# Altium PCB PEREHOD.PcbDoc
Units mm, origin at the board's own origin, x right, y up, seen from the top; angles counter-clockwise.
Board outline 90.17 x 66.14 mm, 2 copper layers (Top Layer, Bottom Layer); 3 components, 0 nets, 104 pads, 0 vias.
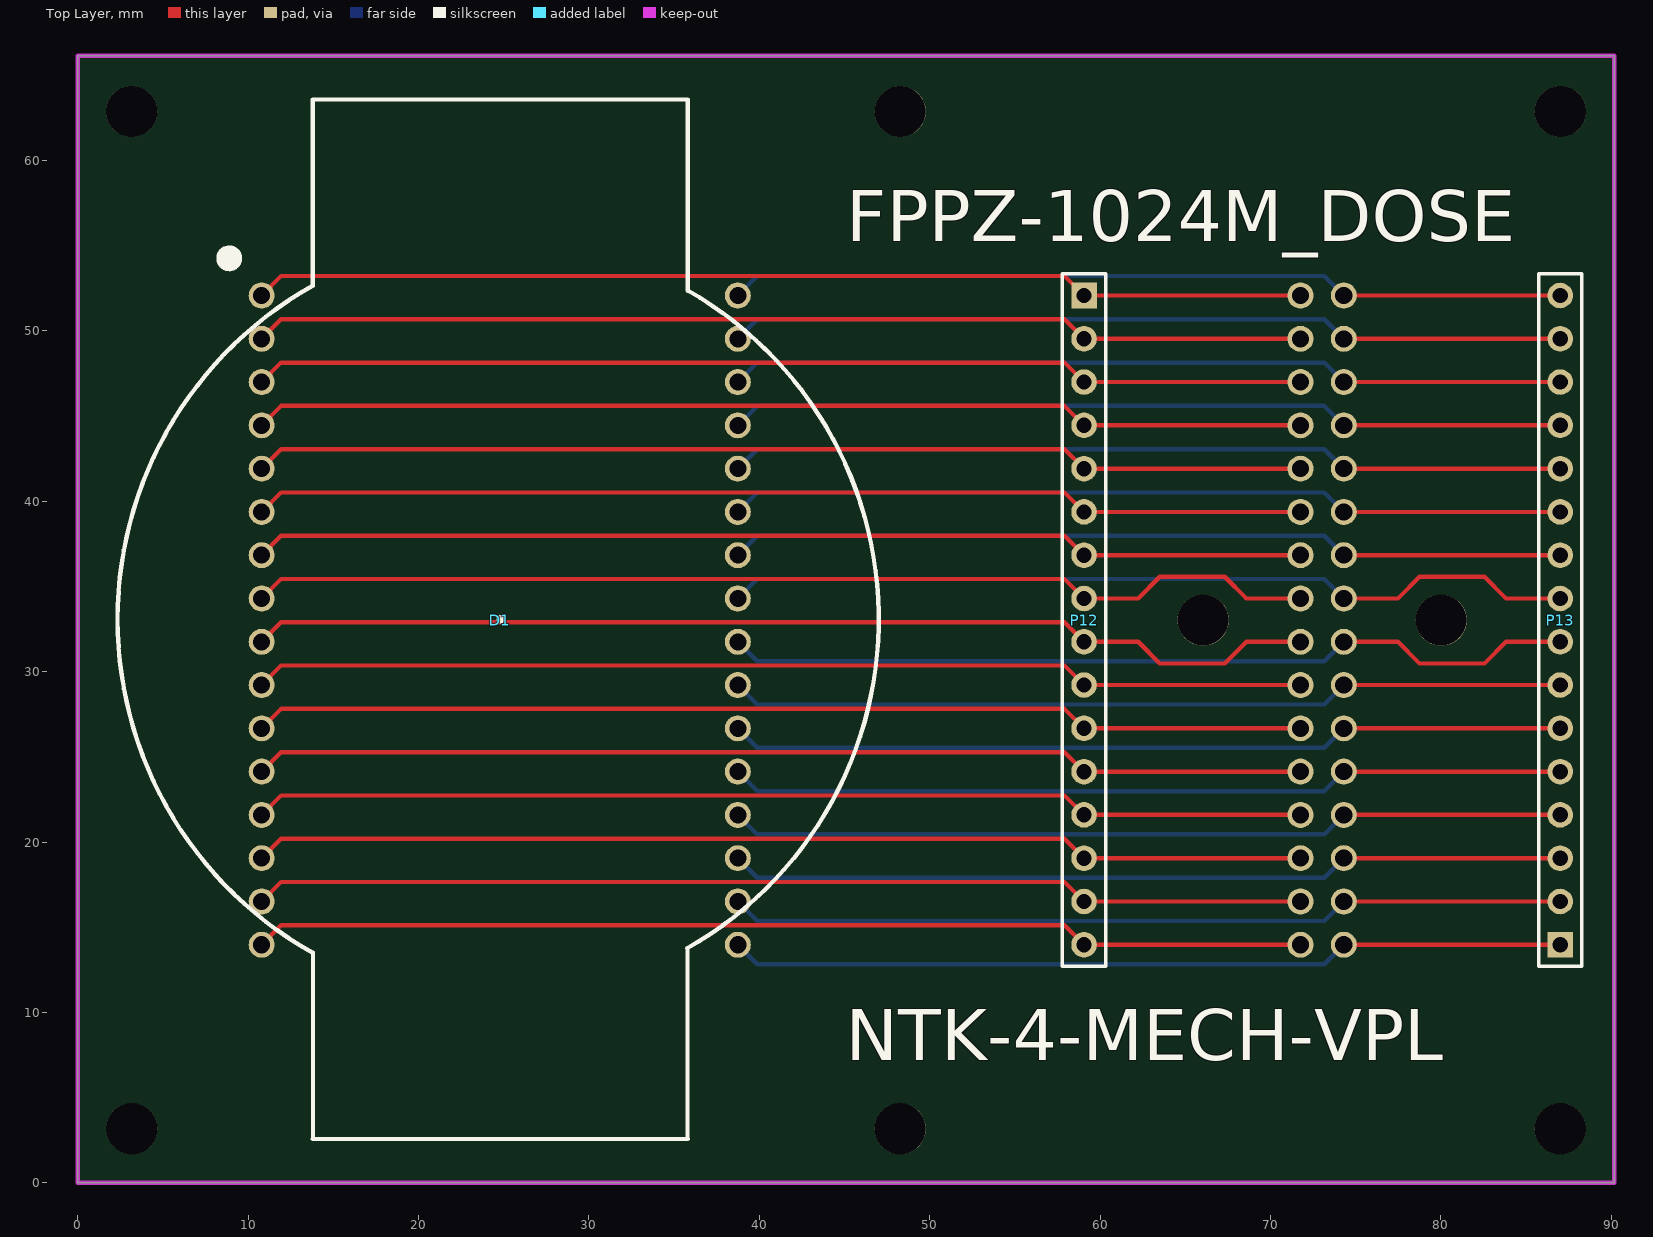
[diagram p0: Top Layer view]
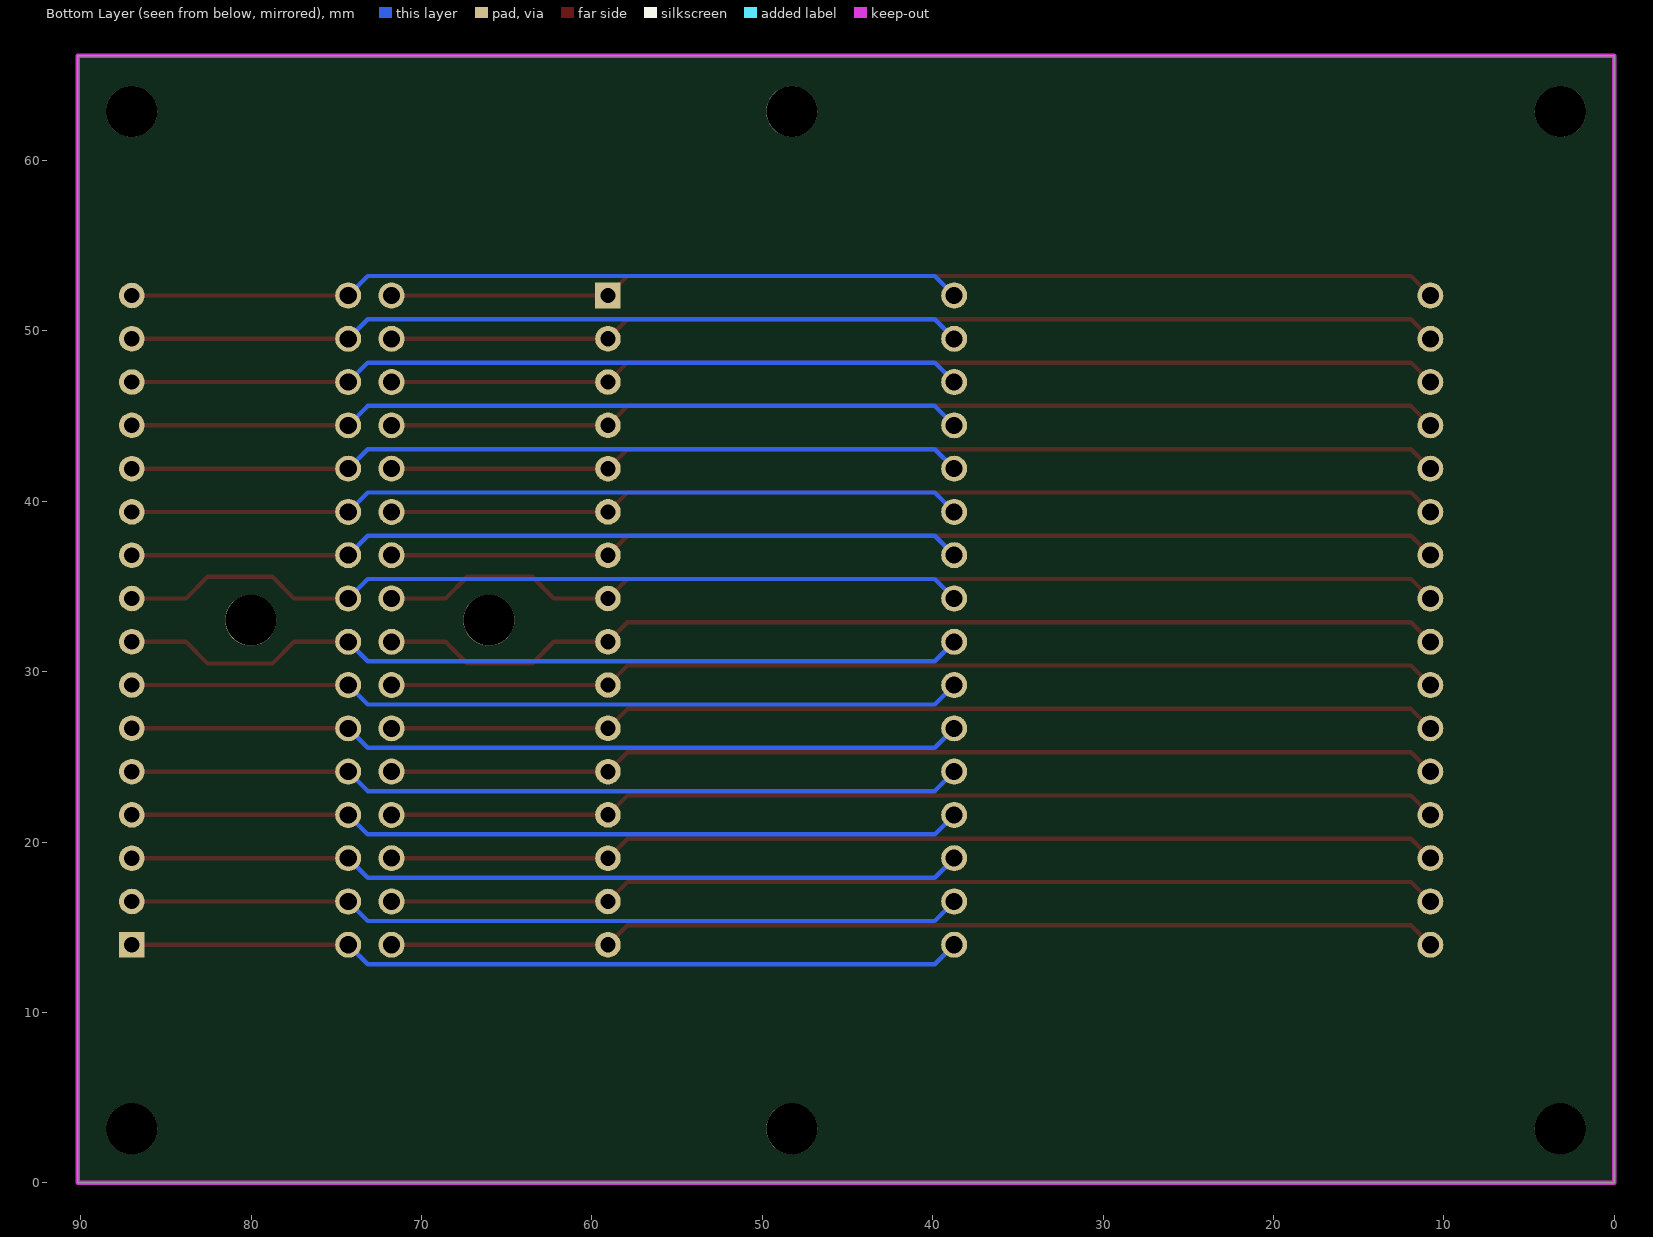
[diagram p1: Bottom Layer view, seen from below]

## Layer stack, top to bottom
Top Solder: solder mask 0.0102, Solder Resist, Dk 3.5
Top Layer: signal copper 0.0356
Dielectric 1: dielectric 0.32, FR-4, Dk 4.8
Bottom Layer: signal copper 0.0356
Bottom Solder: solder mask 0.0102, Solder Resist, Dk 3.5

## Board outline
0,0 90.17,0 90.17,66.142 0,66.142

## Design rules (kind name [scope] priority, off if disabled: settings)
Clearance [All] p1: gap=0.254
PolygonConnect [All] p1: connectstyle=Relief reliefconductorwidth=0.254 reliefentries=4 polygonreliefangle="90 Angle" airgapwidth=0.254
RoutingVias [All] p1: holewidth=0.711 width=1.27 viastyle="Through Hole" minholewidth=0.711 minwidth=1.27 maxholewidth=0.711 maxwidth=1.27
SolderMaskExpansion [All] p1: expansion=0.102
Width [All] p1: maxlimit=0.254 minlimit=0.254 preferedwidth=0.254
29 further rules are at their usual default settings.

## Components (designator, comment, footprint, x,y, rotation, side; value= is the part's Value field where it differs from the comment)
D1 "FPPZ 1024M" FPPZ_1024M 10.795,52.07 r270 top
P12 "Header 16" HDR1X16 59.055,52.07 r270 top
P13 "Header 16" HDR1X16 86.995,13.97 r90 top

## Footprints (in the part's own frame and the unit in brackets; to place one, negate y for a bottom-side part, rotate by r counter-clockwise, add the part's x,y. Pads: shape width x height; smd on the part's side, far side on the other; paste and mask are expansions set on the pad)
FPPZ_1024M [mil]
  round 60 hole 39.37: 1(0,0) 2(100,0) 3(200,0) 4(300,0) 5(400,0) 6(500,0) 7(600,0) 8(700,0) 9(800,0) 10(900,0) 11(1000,0) 12(1100,0) 13(1200,0) 14(1300,0) 15(1400,0) 16(1500,0) 17(1500,1100) 18(1400,1100) 19(1300,1100) 20(1200,1100) 21(1100,1100) 22(1000,1100) 23(900,1100) 24(800,1100) 25(700,1100) 26(600,1100) 27(500,1100) 28(400,1100) 29(300,1100) 30(200,1100) 31(100,1100) 32(0,1100)
  silkscreen extent -453,-333 1949,1425
HDR1X16 [mm] "Connector; Header; 16 Position"
  rect 1.5x1.5 hole 0.9: 1(0,0)
  round 1.5 hole 0.9: 2(2.54,0) 3(5.08,0) 4(7.62,0) 5(10.16,0) 6(12.7,0) 7(15.24,0) 8(17.78,0) 9(20.32,0) 10(22.86,0) 11(25.4,0) 12(27.94,0) 13(30.48,0) 14(33.02,0) 15(35.56,0) 16(38.1,0)
  silkscreen extent -1.27,-1.27 39.37,1.27

## Part data
P12 P13: "Header, 16-Pin"

## Free pads (board coordinates)
  round 3 hole 3 unplated: 0(3.175,3.175) 0(3.175,62.865) 0(48.26,3.175) 0(48.26,62.865) 0(66.04,33.02) 0(80.01,33.02) 0(86.995,3.175) 0(86.995,62.865)
  round 1.524 hole 1: 0(71.755,13.97) 0(71.755,16.51) 0(71.755,19.05) 0(71.755,21.59) 0(71.755,24.13) 0(71.755,26.67) 0(71.755,29.21) 0(71.755,31.75) 0(71.755,34.29) 0(71.755,36.83) 0(71.755,39.37) 0(71.755,41.91) 0(71.755,44.45) 0(71.755,46.99) 0(71.755,49.53) 0(71.755,52.07) 0(74.295,13.97) 0(74.295,16.51) 0(74.295,19.05) 0(74.295,21.59) 0(74.295,24.13) 0(74.295,26.67) 0(74.295,29.21) 0(74.295,31.75) 0(74.295,34.29) 0(74.295,36.83) 0(74.295,39.37) 0(74.295,41.91) 0(74.295,44.45) 0(74.295,46.99) 0(74.295,49.53) 0(74.295,52.07)

## Nets (pads, with @x,y where several pads share a name; then routed paths per layer and width w, separated by ;. In a path a pad name is that pad's centre, name@x,y a point inside that pad or via, vN(x,y) a via of type N, cw(c..) or ccw(c..) an arc to the next point about the centre after c; other vN are vias at no path point)
pads on no net: D1.1 D1.2 D1.3 D1.4 D1.5 D1.6 D1.7 D1.8 D1.9 D1.10 D1.11 D1.12 D1.13 D1.14 D1.15 D1.16 D1.17 D1.18 D1.19 D1.20 D1.21 D1.22 D1.23 D1.24 D1.25 D1.26 D1.27 D1.28 D1.29 D1.30 D1.31 D1.32 P12.1 P12.2 P12.3 P12.4 P12.5 P12.6 P12.7 P12.8 P12.9 P12.10 P12.11 P12.12 P12.13 P12.14 P12.15 P12.16 P13.1 P13.2 P13.3 P13.4 P13.5 P13.6 P13.7 P13.8 P13.9 P13.10 P13.11 P13.12 P13.13 P13.14 P13.15 P13.16
copper on no net: | length 1782
  Top Layer w0.254: 10.795,13.97 11.938,15.113 57.912,15.113 59.055,13.97 71.755,13.97 ; 10.795,16.51 11.938,17.653 57.912,17.653 59.055,16.51 71.755,16.51 ; 10.795,19.05 11.938,20.193 57.912,20.193 59.055,19.05 71.755,19.05 ; 10.795,21.59 11.938,22.733 57.912,22.733 59.055,21.59 71.755,21.59 ; 10.795,24.13 11.938,25.273 57.912,25.273 59.055,24.13 71.755,24.13 ; 10.795,26.67 11.938,27.813 57.912,27.813 59.055,26.67 71.755,26.67 ; 10.795,29.21 11.938,30.353 57.912,30.353 59.055,29.21 71.755,29.21 ; 10.795,31.75 11.938,32.893 57.912,32.893 59.055,31.75 62.23,31.75 63.5,30.48 67.31,30.48 68.58,31.75 71.755,31.75 ; 10.795,34.29 11.938,35.433 57.912,35.433 59.055,34.29 62.23,34.29 63.5,35.56 67.31,35.56 68.58,34.29 71.755,34.29 ; 10.795,36.83 11.938,37.973 57.912,37.973 59.055,36.83 71.755,36.83 ; 10.795,39.37 11.938,40.513 57.912,40.513 59.055,39.37 71.755,39.37 ; 10.795,41.91 11.938,43.053 57.912,43.053 59.055,41.91 71.755,41.91 ; 10.795,44.45 11.938,45.593 57.912,45.593 59.055,44.45 71.755,44.45 ; 10.795,46.99 11.938,48.133 57.912,48.133 59.055,46.99 71.755,46.99 ; 10.795,49.53 11.938,50.673 57.912,50.673 59.055,49.53 71.755,49.53 ; 10.795,52.07 11.938,53.213 57.912,53.213 59.055,52.07 71.755,52.07 ; 74.295,13.97 86.995,13.97 ; 74.295,16.51 86.995,16.51 ; 74.295,19.05 86.995,19.05 ; 74.295,21.59 86.995,21.59 ; 74.295,24.13 86.995,24.13 ; 74.295,26.67 86.995,26.67 ; 74.295,29.21 86.995,29.21 ; 74.295,31.75 77.47,31.75 78.74,30.48 82.55,30.48 83.82,31.75 86.995,31.75 ; 74.295,34.29 77.47,34.29 78.74,35.56 82.55,35.56 83.82,34.29 86.995,34.29 ; 74.295,36.83 86.995,36.83 ; 74.295,39.37 86.995,39.37 ; 74.295,41.91 86.995,41.91 ; 74.295,44.45 86.995,44.45 ; 74.295,46.99 86.995,46.99 ; 74.295,49.53 86.995,49.53 ; 74.295,52.07 86.995,52.07
  Bottom Layer w0.254: 38.735,13.97 39.878,12.827 73.152,12.827 74.295,13.97 ; 38.735,16.51 39.878,15.367 73.152,15.367 74.295,16.51 ; 38.735,19.05 39.878,17.907 73.152,17.907 74.295,19.05 ; 38.735,21.59 39.878,20.447 73.152,20.447 74.295,21.59 ; 38.735,24.13 39.878,22.987 73.152,22.987 74.295,24.13 ; 38.735,26.67 39.878,25.527 73.152,25.527 74.295,26.67 ; 38.735,29.21 39.878,28.067 73.152,28.067 74.295,29.21 ; 38.735,31.75 39.878,30.607 73.152,30.607 74.295,31.75 ; 38.735,34.29 39.878,35.433 73.152,35.433 74.295,34.29 ; 38.735,36.83 39.878,37.973 73.152,37.973 74.295,36.83 ; 38.735,39.37 39.878,40.513 73.152,40.513 74.295,39.37 ; 38.735,41.91 39.878,43.053 73.152,43.053 74.295,41.91 ; 38.735,44.45 39.878,45.593 73.152,45.593 74.295,44.45 ; 38.735,46.99 39.878,48.133 73.152,48.133 74.295,46.99 ; 38.735,49.53 39.878,50.673 73.152,50.673 74.295,49.53 ; 38.735,52.07 39.878,53.213 73.152,53.213 74.295,52.07

## Keep-outs
Keep-Out Layer:
  the board outline again, w0.254

## Silkscreen, mask and mechanical layers (free items; w line width, h text height)
Top Overlay:
  text "FPPZ-1024M_DOSE" at 45.085,55.245 h3
  text "NTK-4-MECH-VPL" at 45.085,7.188 h3